# Altium PCB GniMp3.PcbDoc
Units mil, origin at the board's own origin, x right, y up, seen from the top; angles counter-clockwise.
Board outline 6000 x 4000 mil, 2 copper layers (Top Layer, Bottom Layer); 52 components, 37 nets, 213 pads, 24 vias.
Unrouted connection lines stored in the file: 4.
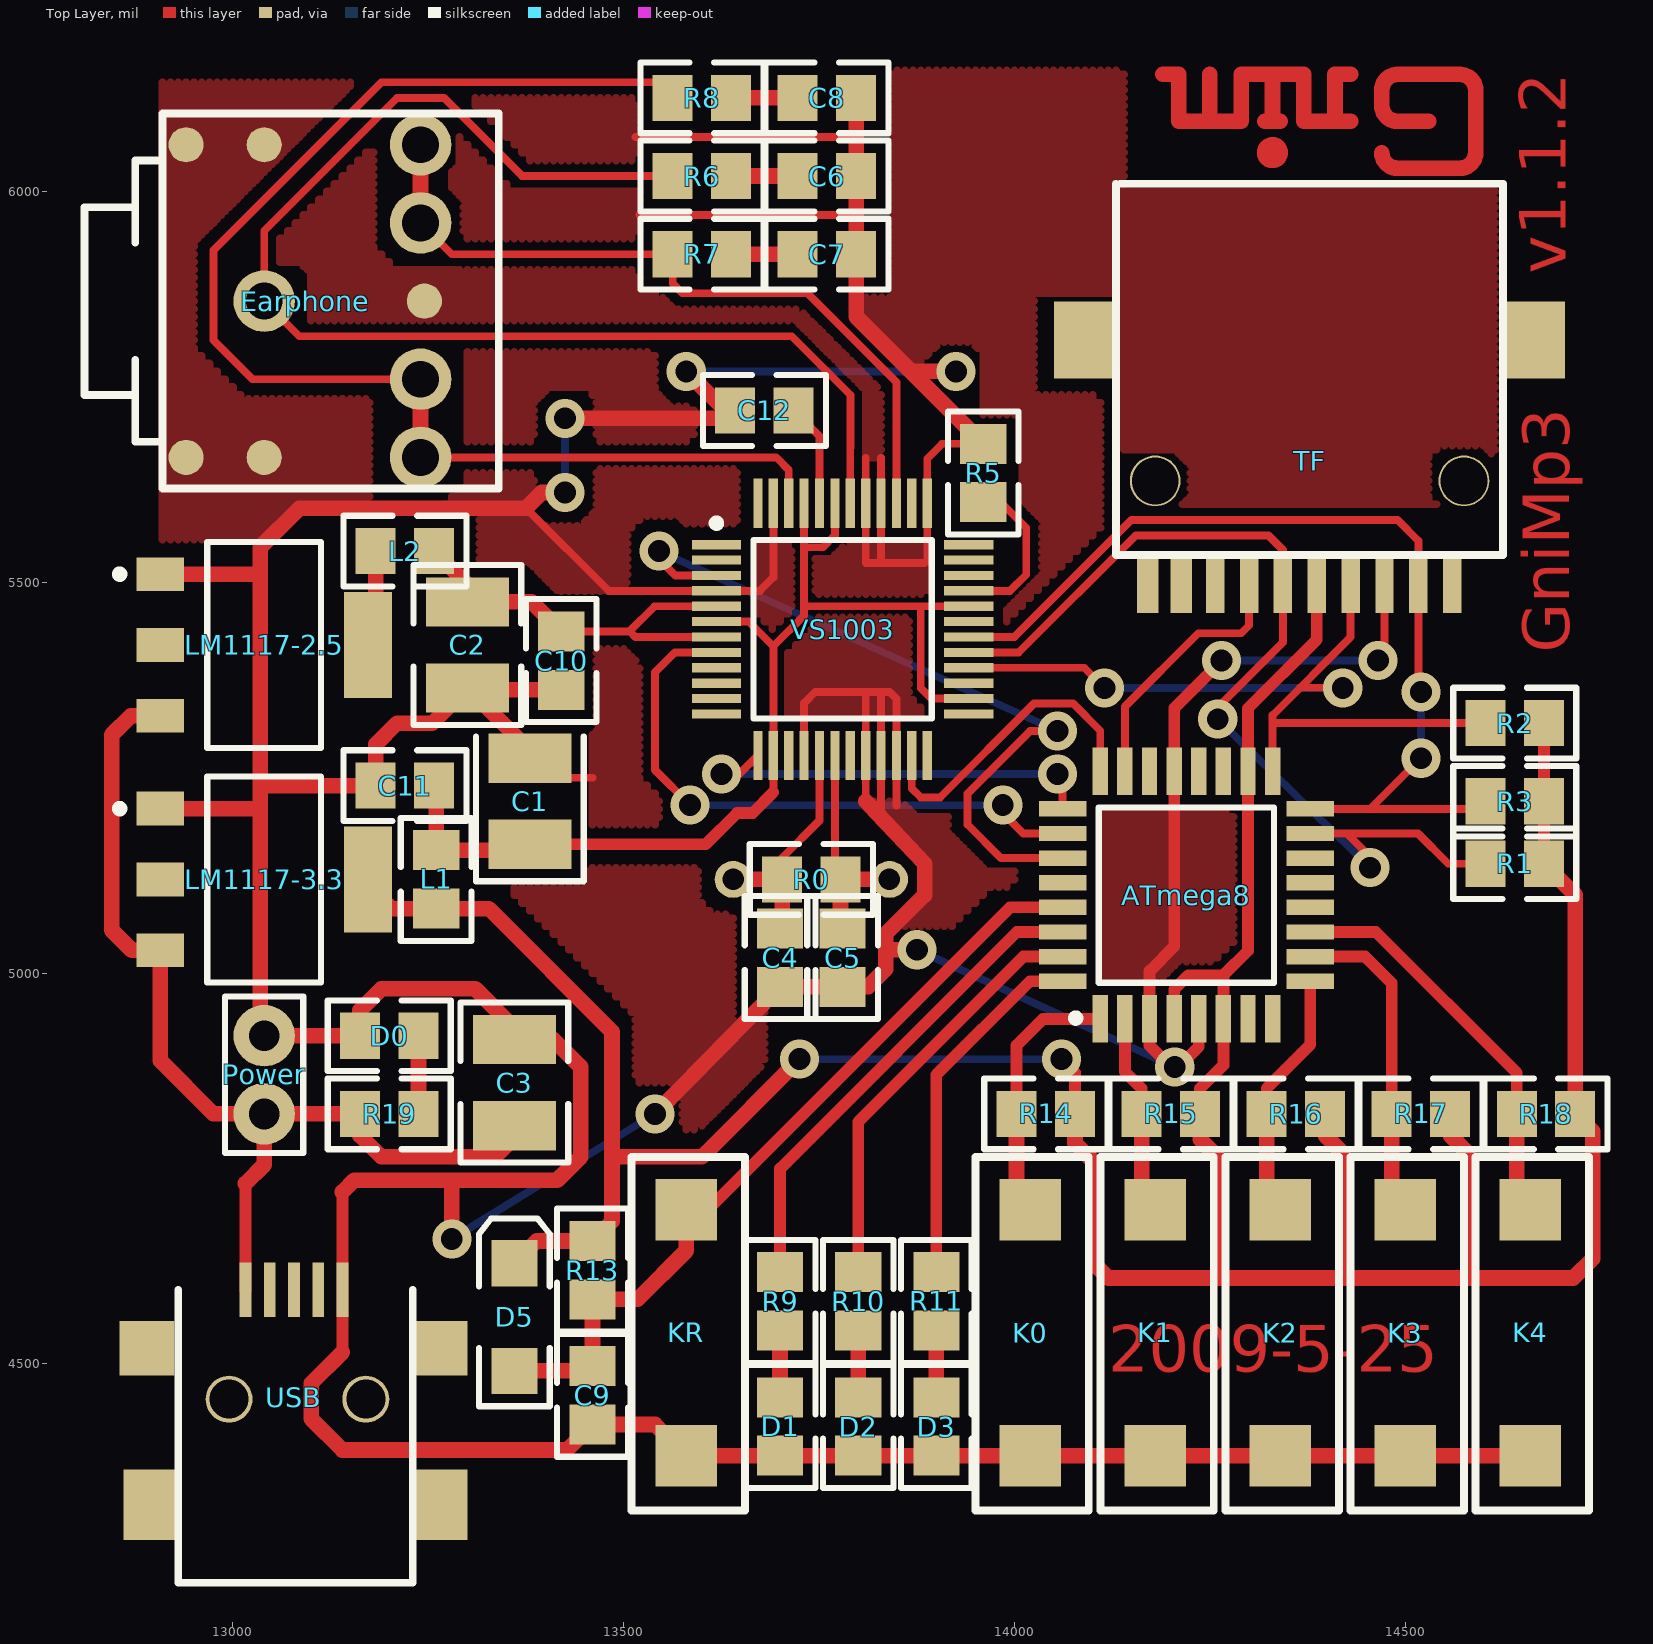
[diagram p0: Top Layer view]
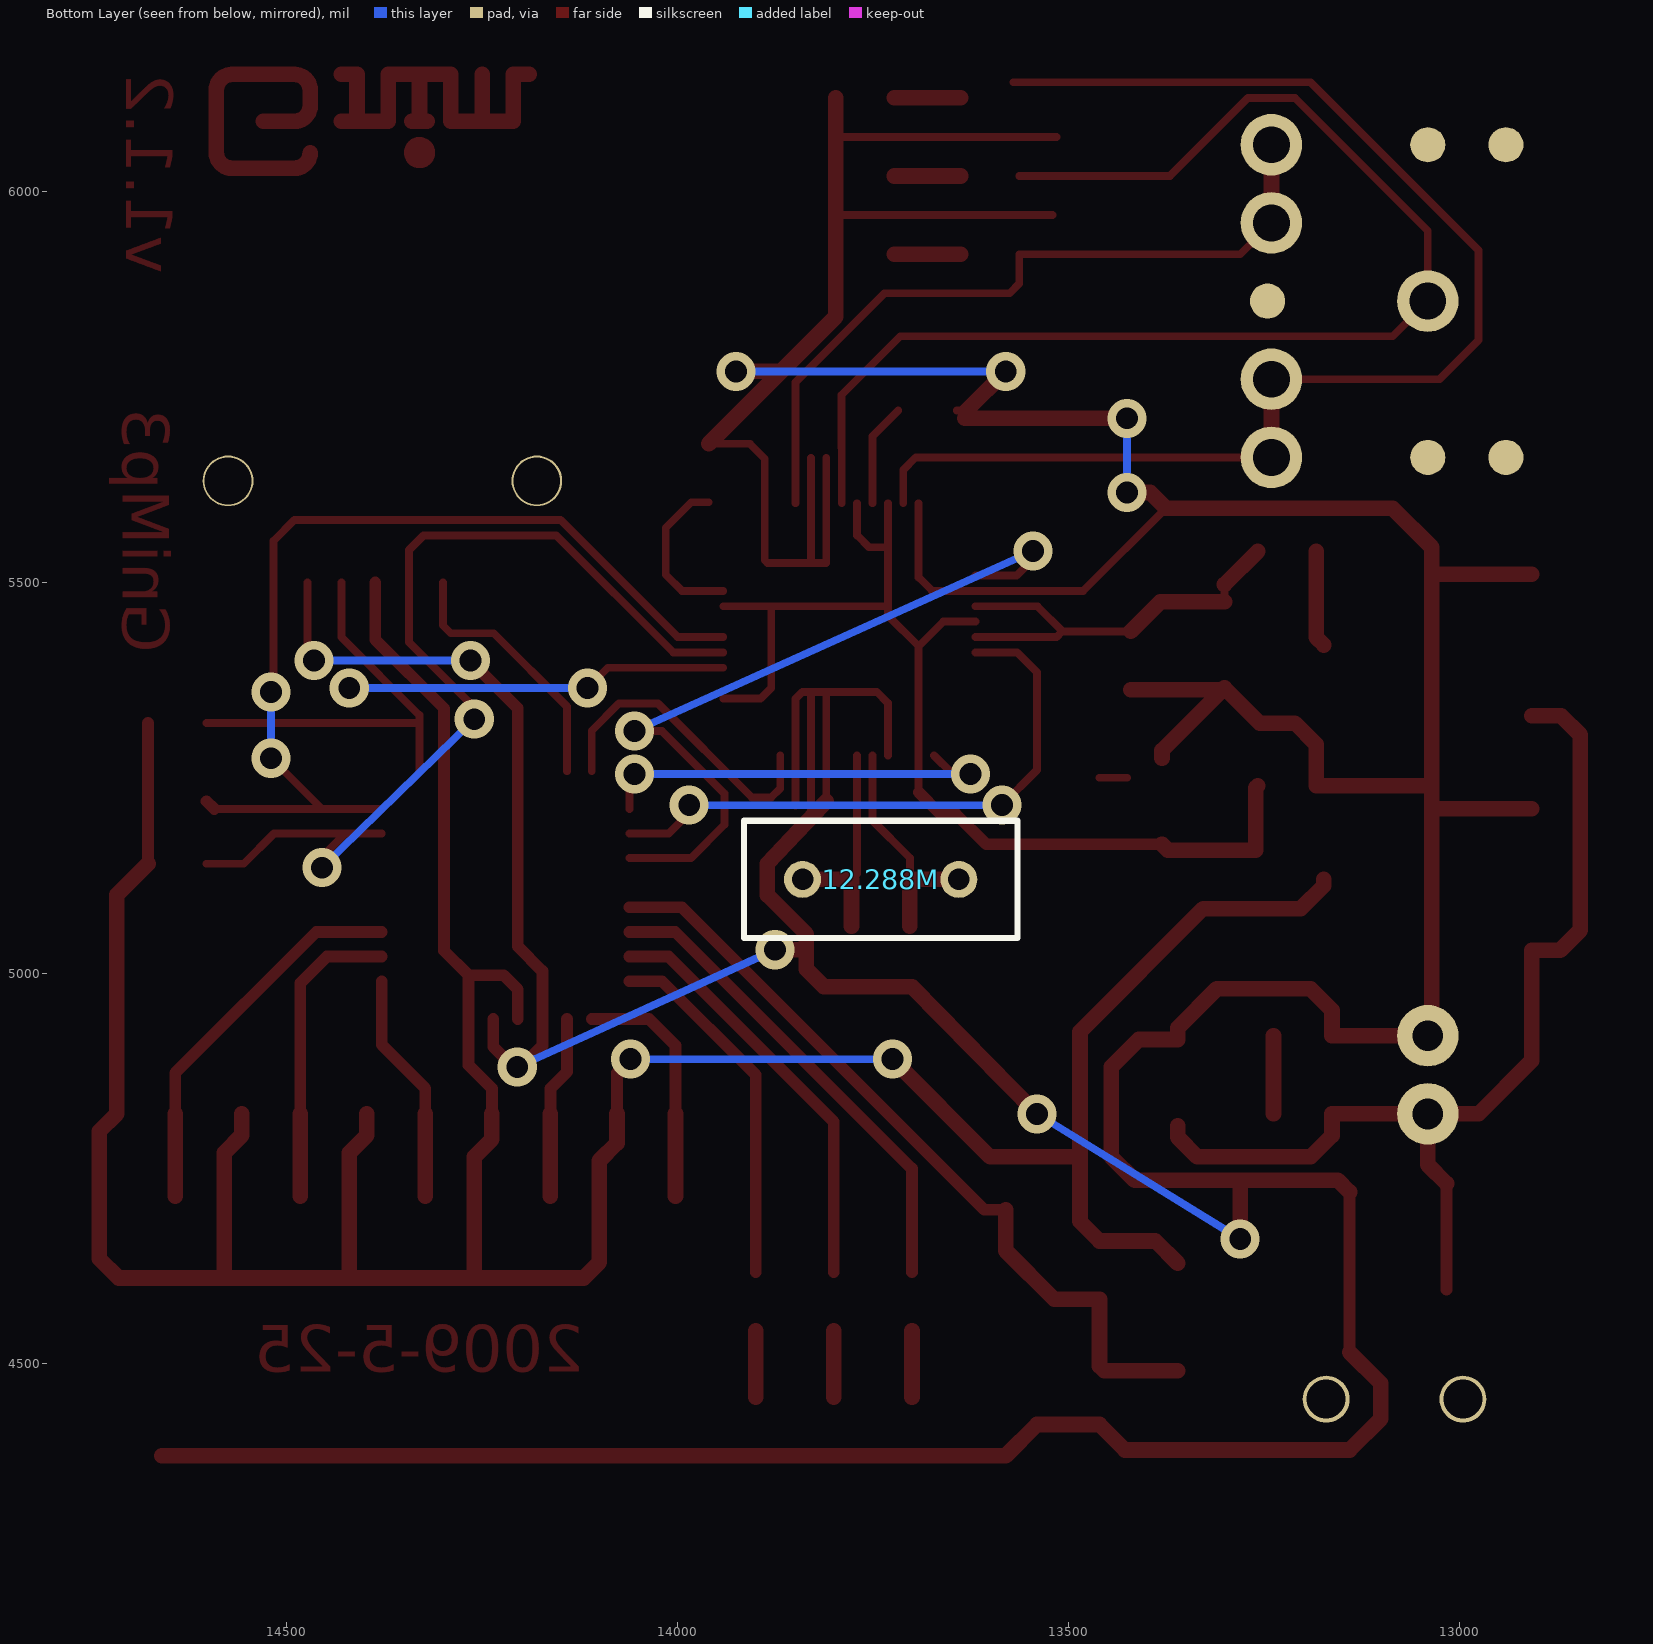
[diagram p1: Bottom Layer view, seen from below]

## Layer stack, top to bottom
Top Layer: signal copper 1.4
Dielectric: dielectric 12.6, FR-4, Dk 4.8
Bottom Layer: signal copper 1.4

## Board outline
1000,1000 7000,1000 7000,5000 1000,5000

## Design rules (kind name [scope] priority, off if disabled: settings)
Clearance [All] p1 off: gap=10
ComponentClearance [All] p1 off: gap=10 collisioncheckmode=0
FanoutControl Fanout_BGA [IsBGA] p1 off: bgadir=Out bgaviamode=Centered fanoutstyle=Auto fanoutdirection=Alternating viagrid=1 // Fanout_BGA (Default Rule)
FanoutControl Fanout_LCC [IsLCC] p2 off: bgadir=Out bgaviamode=Centered fanoutstyle=Auto fanoutdirection=Alternating viagrid=1 // Fanout_LCC (Default Rule)
FanoutControl Fanout_SOIC [IsSOIC] p3 off: bgadir=Out bgaviamode=Centered fanoutstyle=Auto fanoutdirection=Alternating viagrid=1 // Fanout_SOIC (Default Rule)
FanoutControl Fanout_Small [(CompPinCount < 5)] p4 off: bgadir=Out bgaviamode=Centered fanoutstyle=Auto fanoutdirection=OutThenIn viagrid=1 // Fanout_Small (Default Rule)
FanoutControl Fanout_Default [All] p5 off: bgadir=Out bgaviamode=Centered fanoutstyle=Auto fanoutdirection=Alternating viagrid=1 // Fanout_Default (Default Rule)
Height [All] p1 off: minheight=0 maxheight=1000 prefheight=500
HoleSize [All] p1 off: absolutevalues=TRUE maxlimit=100 minlimit=1 maxpercent=80.000 minpercent=20.000
LayerPairs [All] p1 off: enforce=TRUE
PasteMaskExpansion [All] p1 off: expansion=0
PlaneClearance [All] p1 off: clearance=20
PlaneConnect [All] p1 off: planeconnectstyle=Relief reliefexpansion=20 reliefentries=4 reliefconductorwidth=10 reliefairgap=10
PolygonConnect [All] p1 off: connectstyle=Relief reliefconductorwidth=10 reliefentries=4 polygonreliefangle="90 Angle"
RoomDefinition GniMp3 [InComponentClass('GniMp3')] p1 off: confinementstyle=ConfineIn formatcopy=TRUE outline 0,0 2000,0 2000,1000 0,1000
RoutingCorners [All] p1 off: cornerstyle=45-Degree minsetback=100 maxsetback=100
RoutingLayers [All] p1 off: top layer=Horizontal bottom layer=Vertical
RoutingPriority [All] p1 off: routingpriority=0
RoutingTopology [All] p1 off: topology=Shortest
RoutingVias [All] p1 off: holewidth=28 width=50 viastyle="Through Hole" minholewidth=28 minwidth=50 maxholewidth=28 maxwidth=50
ShortCircuit [All] p1 off: allowed=FALSE
SolderMaskExpansion [All] p1 off: expansion=4
TestPointUsage [All] p1 off: valid=0 allowmultiple=FALSE
Testpoint [All] p1 off: side=15 testpointundercomponent=TRUE minsize=40 maxsize=100 preferedsize=60 minholesize=0 maxholesize=40 preferedholesize=32 testpointgrid=1 style=1023 order=1234567890
UnRoutedNet [All] p1 off:
Width [All] p1 off: maxlimit=20 minlimit=10 preferedwidth=10 minimp=50.000000 maximp=50.000000 favimp=50.000000

## Components (designator, comment, footprint, x,y, rotation, side; value= is the part's Value field where it differs from the comment)
12.288M "XTAL" RAD-0.2 13740,5120 r0 bottom
ATmega8 "ATmega8-16AC" 32A 14220,5100 r90 top
C1 "Cap Pol3" CC3225-1210 13380,5220 r90 top
C2 "Cap Pol3" CR3225-1210 13300,5420 r270 top
C3 "Cap Pol3" CR3225-1210 13360,4860 r90 top
C4 "Cap Semi" CR2012-0805 13700,5020 r90 top
C5 "Cap Semi" CR2012-0805 13780,5020 r270 top
C6 "Cap Semi" CR2012-0805 13760,6020 r180 top
C7 "Cap Semi" CR2012-0805 13760,5920 r180 top
C8 "Cap Semi" CR2012-0805 13760,6120 r180 top
C9 "Cap Semi" CR2012-0805 13460,4460 r90 top
C10 "Cap Semi" CR2012-0805 13420,5400 r90 top
C11 "Cap Semi" CR2012-0805 13220,5240 r0 top
C12 "Cap Semi" CR2012-0805 13680,5720 r180 top
D0 "LED2" R2012-0805 13200,4920 r180 top
D1 "LED2" R2012-0805 13700,4420 r270 top
D2 "LED2" R2012-0805 13800,4420 r270 top
D3 "LED2" R2012-0805 13900,4420 r270 top
D5 "Diode 1N4148" DSO-F2/D6.1 13360,4560 r90 top
Earphone "Earphone" Earphone 13040,5860 r90 top
K0 "SW-PB" Key 14020,4540 r270 top
K1 "SW-PB" Key 14180,4540 r270 top
K2 "SW-PB" Key 14340,4540 r270 top
K3 "SW-PB" Key 14500,4540 r270 top
K4 "SW-PB" Key 14660,4540 r270 top
KR "SW-PB" Key 13580,4540 r270 top
L1 "Inductor" R2012-0805 13260,5120 r270 top
L2 "Inductor" R2012-0805 13220,5540 r180 top
LM1117-2.5 "REG1117-5" ZZ311 13040,5420 r270 top
LM1117-3.3 "REG1117-5" ZZ311 13040,5120 r270 top
Power "Header 2" HDR1X2 13040,4920 r270 top
R0 "Res3" R2012-0805 13740,5120 r180 top
R1 "Res3" R2012-0805 14640,5140 r0 top
R2 "Res3" R2012-0805 14640,5320 r0 top
R3 "Res3" R2012-0805 14640,5220 r0 top
R5 "Res3" R2012-0805 13960,5640 r270 top
R6 "Res3" R2012-0805 13600,6020 r180 top
R7 "Res3" R2012-0805 13600,5920 r180 top
R8 "Res3" R2012-0805 13600,6120 r180 top
R9 "Res3" R2012-0805 13700,4580 r90 top
R10 "Res3" R2012-0805 13800,4580 r90 top
R11 "Res3" R2012-0805 13900,4580 r90 top
R13 "Res3" R2012-0805 13460,4620 r90 top
R14 "Res3" R2012-0805 14040,4820 r0 top
R15 "Res3" R2012-0805 14200,4820 r0 top
R16 "Res3" R2012-0805 14360,4820 r0 top
R17 "Res3" R2012-0805 14520,4820 r0 top
R18 "Res3" R2012-0805 14680,4820 r0 top
R19 "Res3" R2012-0805 13200,4820 r180 top
TF "TFcard" "TF Card" 14560,5500 r180 top
USB "USB" mini_USB 13080,4460 r180 top
VS1003 "VS1003B" TQFP-48 13780,5440 r0 top

## Footprints (in the part's own frame and the unit in brackets; to place one, negate y for a bottom-side part, rotate by r counter-clockwise, add the part's x,y. Pads: shape width x height; smd on the part's side, far side on the other; paste and mask are expansions set on the pad)
32A [mm] "QFP; 32 Leads; Body 7 x 7 mm; Pitch 0.8 mm"
  rect 1.55x0.5 smd: 1(-4.025,2.8) 2(-4.025,2) 3(-4.025,1.2) 4(-4.025,0.4) 5(-4.025,-0.4) 6(-4.025,-1.2) 7(-4.025,-2) 8(-4.025,-2.8) 17(4.025,-2.8) 18(4.025,-2) 19(4.025,-1.2) 20(4.025,-0.4) 21(4.025,0.4) 22(4.025,1.2) 23(4.025,2) 24(4.025,2.8)
  rect 0.5x1.55 smd: 9(-2.8,-4.025) 10(-2,-4.025) 11(-1.2,-4.025) 12(-0.4,-4.025) 13(0.4,-4.025) 14(1.2,-4.025) 15(2,-4.025) 16(2.8,-4.025) 25(2.8,4.025) 26(2,4.025) 27(1.2,4.025) 28(0.4,4.025) 29(-0.4,4.025) 30(-1.2,4.025) 31(-2,4.025) 32(-2.8,4.025)
  silkscreen extent -4.12,-2.85 2.85,3.72
CC3225-1210 [mm]
  rect 1.6x2.7 smd: 1(-1.4,0) 2(1.4,0)
  silkscreen extent -2.6,-1.75 2.1,1.75
CR2012-0805 [mm]
  rect 1.3x1.5 smd: 1(-0.95,0) 2(0.95,0)
  silkscreen extent -2,-1.15 2,1.15
CR3225-1210 [mm]
  rect 1.6x2.7 smd: 1(-1.4,0) 2(1.4,0)
  silkscreen extent -2.6,-1.75 2.6,1.75
DSO-F2/D6.1 [mm]
  rect 1.5x1.5 smd: 1(-1.75,0) 2(1.75,0)
  silkscreen extent -2.9,-1.15 3.2,1.15
Earphone [mm] "Earphone"
  round 1.143 all layers, no hole: 0(-5.08,0) 0(-5.08,2.54) 0(0,-5.207) 0(5.08,0) 0(5.08,2.54)
  round 2 hole 1.2: 1(-5.08,-5.08) 2(-2.54,-5.08) 3(2.54,-5.08) 4(5.08,-5.08) 5(0,0)
  silkscreen extent -6.1,-7.62 6.1,5.84
HDR1X2 [mm] "Connector; Header; 2 Position"
  round 2 hole 1: 1(0,0) 2(2.54,0)
  silkscreen extent -1.27,-1.27 3.81,1.27
Key [mm]
  rect 2x2 smd: 1(-4,0) 2(4,0)
  silkscreen extent -5.71,-1.78 5.78,1.91
mini_USB [mil]
  rect 70x90 smd: 0(-185,140) 0(185,140)
  rect 70x70 smd: 0(-185,-60) 0(190,-60)
  round 60 hole 50: 0(-90,5) 0(85,5)
  rect 15x70 smd: 1(64,-135) 2(33,-135) 3(2,-135) 4(-60,-135) NC(-29,-135)
  silkscreen extent -150,-135 150,240
R2012-0805 [mm]
  rect 1.3x1.5 smd: 1(-0.95,0) 2(0.95,0)
  silkscreen extent -2,-1.15 2,1.15
RAD-0.2 [mm]
  round 1.2 hole 0.7: 1(-2.54,0) 2(2.54,0)
  silkscreen extent -4.44,-1.91 4.44,1.91
"TF Card" [mm]
  rect 2x2.5 smd: 0(-2.667,-7.874) 0(11.938,-7.874)
  round 1.651 hole 1.524: 0(-0.381,-3.302) 0(9.652,-3.302)
  rect 0.6x2 smd: 1(6.6,0) 2(5.5,0) 4(4.4,0) 5(3.3,0) 6(2.2,0) 7(1.1,0) 8(0,0) 9(7.7,0)
  rect 0.7x2 smd: 10(8.8,0) 11(9.9,0)
  silkscreen extent -1.65,-12.95 10.92,-0.89
TQFP-48 [mm] "QFP; 48 Leads; Body 7 x 7 mm; Pitch 0.5 mm"
  rect 1.6x0.3 smd: 1(-4.1,2.75) 2(-4.1,2.25) 3(-4.1,1.75) 4(-4.1,1.25) 5(-4.1,0.75) 6(-4.1,0.25) 7(-4.1,-0.25) 8(-4.1,-0.75) 9(-4.1,-1.25) 10(-4.1,-1.75) 11(-4.1,-2.25) 12(-4.1,-2.75) 25(4.1,-2.75) 26(4.1,-2.25) 27(4.1,-1.75) 28(4.1,-1.25) 29(4.1,-0.75) 30(4.1,-0.25) 31(4.1,0.25) 32(4.1,0.75) 33(4.1,1.25) 34(4.1,1.75) 35(4.1,2.25) 36(4.1,2.75)
  rect 0.3x1.6 smd: 13(-2.75,-4.1) 14(-2.25,-4.1) 15(-1.75,-4.1) 16(-1.25,-4.1) 17(-0.75,-4.1) 18(-0.25,-4.1) 19(0.25,-4.1) 20(0.75,-4.1) 21(1.25,-4.1) 22(1.75,-4.1) 23(2.25,-4.1) 24(2.75,-4.1) 37(2.75,4.1) 38(2.25,4.1) 39(1.75,4.1) 40(1.25,4.1) 41(0.75,4.1) 42(0.25,4.1) 43(-0.25,4.1) 44(-0.75,4.1) 45(-1.25,4.1) 46(-1.75,4.1) 47(-2.25,4.1) 48(-2.75,4.1)
  silkscreen extent -4.22,-2.9 2.9,3.57
ZZ311 [mm] "SOT-223/SC-73; 4 Leads; Body 6.7 x 7.3 mm, inc. leads (LxW max)"
  rect 1.1x1.55 smd: 1(-2.3,-3.375) 2(0,-3.375) 3(2.3,-3.375)
  rect 3.45x1.55 smd: 4(0,3.375)
  silkscreen extent -3.35,-4.82 3.35,1.85

## Part data
12.288M: "Crystal Oscillator"
ATmega8: "8-Bit AVR Microcontroller with 8K Bytes of In-System Programmable Flash Memory"
C1 C2 C3: "Polarized Capacitor (Surface Mount)"
C4 C5 C6 C7 C8 C9 C10 C11 C12: "Capacitor (Semiconductor SIM Model)"
D0 D1 D2 D3: "Typical RED, GREEN, YELLOW, AMBER GaAs LED"
D5: "High Conductance Fast Diode"
K0 K1 K2 K3 K4 KR: "Switch"
LM1117-2.5 LM1117-3.3: "800mA and 1A Low Dropout Positive Regulator 2.85V, 3.3V, 5V, and Adjustable"
Power: "Header, 2-Pin"
R0 R1 R2 R3 R5 R6 R7 R8 R9 R10 R11 R13 R14 R15 R16 R17 R18 R19: "Resistor"

## Via types
v1: diameter 50, hole 28, Top Layer to Bottom Layer, 24 vias

## Nets (pads, with @x,y where several pads share a name; then routed paths per layer and width w, separated by ;. In a path a pad name is that pad's centre, name@x,y a point inside that pad or via, vN(x,y) a via of type N, cw(c..) or ccw(c..) an arc to the next point about the centre after c; other vN are vias at no path point)
2.5V: L2.2 LM1117-2.5.4 | length 124
  Top Layer w20: LM1117-2.5.4 13182.6,5429.72 L2.2
3.3V: ATmega8.4 ATmega8.6 ATmega8.18 D5.2 L1.2 LM1117-3.3.4 R1.2 R2.2 R3.2 R13.2 R14.2 R15.2 R16.2 R17.2 R18.2 TF.4 | length 4568.4
  Top Layer w15: v1(14060,4890) 14077.4,4872.6 R14.2 ; ATmega8.4 14204.25,4979.25 14222.24,4997.24 14267.24,4997.24 ; R15.2 14237.4,4852.6 14237.6,4852.6 14267.24,4882.24 14267.24,4997.24 ; TF.4 14386.77,5426.77 14298.74,5338.74 14298.74,5028.74 14267.24,4997.24 ; R1.2 R2.2
  Top Layer w20: LM1117-3.3.4 13172.87,5112.13 13202.4,5082.6 13327.4,5082.6 13485,4925 13485,4682.4 R13.2 13388.5,4657.4 D5.2 ; 13485,4765 13600,4765 v1(13725,4890) ; R14.2 14077.4,4782.6 14100,4760 14100,4630 14120,4610 14715,4610 14740,4635 14740,4797.4 R18.2 14717.4,5100 R1.2 ; R15.2 14237.4,4787.6 14260,4765 14260,4610 ; R16.2 14397.4,4792.6 14420,4770 14420,4610 ; R17.2 14557.4,4792.6 14580,4770 14580,4610
  Bottom Layer w10: v1(13725,4890) v1(14060,4890)
AVDD: C1.1 C11.2 L1.1 VS1003.6 VS1003.14 VS1003.19 VS1003.26 VS1003.32 VS1003.38 VS1003.43 VS1003.45 | length 1486.6
  Top Layer w10: VS1003.6 13659.84,5449.84 13691.42,5418.27 ; 13691.42,5231.42 13691.42,5418.27 ; 13730.79,5545 13755,5545 13770.16,5560.16 VS1003.43 ; VS1003.45 13730.79,5457.64 13691.42,5418.27 ; 13731.26,5469.53 VS1003.32 ; 13880,5469.53 13880,5365 13893.58,5351.42 VS1003.26
  Top Layer w15: C1.1 13604.88,5164.88 13645,5205 13665,5205 13691.42,5231.42
  Top Layer w20: C11.2 13260,5237.4 L1.1 13372.52,5157.4 C1.1
CVDD: C2.1 C10.2 L2.1 VS1003.5 VS1003.7 VS1003.24 VS1003.31 | length 544.2
  Top Layer w10: C2.1 C2.1@13300,5497.4 ; C10.2 13507.6,5437.4 13514.84,5430.16 VS1003.7 ; 13507.4,5437.4 13539.53,5469.53 VS1003.5
  Top Layer w20: L2.1 C2.1@13300,5497.4 ; C2.1 13382.28,5475.12 C10.2
GND: ATmega8.3 ATmega8.5 ATmega8.21 C1.2 C2.2 C3.2 C4.1 C5.2 C6.1 C7.1 C8.1 C9.1 C10.1 C11.1 C12.2 D0.2 D1.2 D2.2 D3.2 K0.2 K1.2 K2.2 K3.2 K4.2 KR.2 LM1117-2.5.1 LM1117-3.3.1 Power.1 R5.1 TF.6 USB.4 VS1003.4 VS1003.16 VS1003.20 VS1003.21 VS1003.22 VS1003.37 VS1003.40 VS1003.41 VS1003.47 | length 10641.2
  Top Layer w10: 13375,5595 13480.79,5489.21 13674.21,5489.21 13691.42,5506.42 VS1003.47 ; C1.2@13425,5250 13460,5250 ; 13515,6070 13797.4,6070 ; 13520,5970 13797.4,5970 ; C12.2@13630,5720 C12.2 ; VS1003.16 13730.79,5345.79 13745,5360 13840,5360 13848.9,5351.1 13848.9,5214.63 ; 13809.53,5220 13809.53,5359.53 ; 13809.53,5659.53 13809.53,5525.47 13810,5525 13885,5525 13888.27,5528.27 13888.27,5658.27 13907.4,5677.4 R5.1 ; 13829.21,5210.79 13829.21,5359.21 ; 13829.21,5525.79 13829.21,5659.21 ; v1@14200,4880 v1@14210,4880 ; v1(14465,5400) 14473.39,5408.39 TF.6
  Top Layer w15: 13140,4515 USB.4 13140,4720 ; v1@14200,4880 14172.76,4907.24 ATmega8.3 14172.76,5002.76 14204.25,5034.25 ATmega8.21 14204.25,5339.25 v1(14265,5400) ; v1@14210,4880 14235.75,4905.75 ATmega8.5
  Top Layer w20: LM1117-3.3.1 13034.45,5210.55 ; LM1117-2.5.1 13034.45,5510.55 ; Power.1@13035,4925 13035,5545 13085,5595 13375,5595 13395,5615 v1(13425,5615) ; 13035,5240 C11.1 13182.6,5292.6 13210,5320 13255.12,5320 C2.2 13380,5284.88 C1.2 ; Power.1 D0.2 13162.6,4952.6 13190,4980 13310,4980 13360,4930 C3.2 13409.88,4915.12 13445,4880 13445,4765 13415,4735 13155,4735 13140,4720 ; 13140,4515 13100,4475 13100,4430 13140,4390 13427.4,4390 C9.1 13539.92,4422.6 KR.2 K4.2 ; v1(13280,4660) 13280,4735 ; C2.2@13302.28,5362.6 C10.1 ; v1(13425,5710) C12.2@13632.6,5710 ; v1(13540,4820) C4.1 C5.2 13812.6,4982.6 13835,5005 13835,5050 13885,5100 13885,5140 13823.4,5205.3 13809.53,5220 ; v1(13580,5770) C12.2@13630,5720 ; C8.1 C7.1 13797.4,5840 R5.1 ; 13835,5030 v1(13875,5030) ; 13867.4,5770 v1(13925,5770)
  Bottom Layer w10: v1(13280,4660) v1(13540,4820) ; v1(13425,5615) v1(13425,5710) ; v1(13580,5770) v1(13925,5770) ; v1(13875,5030) v1(14205,4880) ; v1(14265,5400) v1(14465,5400)
Net12.288M_1: 12.288M.1 C4.2 R0.2 VS1003.17 | length 301
  Top Layer w10: R0.2 13702.6,5147.6 13750.47,5195.47 VS1003.17
  Top Layer w20: 12.288M.1 R0.2 C4.2@13702.6,5060
Net12.288M_2: 12.288M.2 C5.1 R0.1 VS1003.18 | length 273.9
  Top Layer w10: R0.1@13770.16,5127.24 VS1003.18
  Top Layer w20: C5.1@13777.4,5060 R0.1 12.288M.2
NetATmega8_1: ATmega8.1 K0.1 R14.1 | length 313.9
  Top Layer w15: R14.1 14002.6,4907.6 14036.54,4941.54 ATmega8.1
  Top Layer w20: K0.1@14002.6,4714.88 R14.1
NetATmega8_2: ATmega8.2 K1.1 R15.1 | length 235.5
  Top Layer w15: ATmega8.2 14141.26,4873.74 14162.6,4852.4 R15.1
  Top Layer w20: K1.1@14162.6,4714.88 R15.1
NetATmega8_9: ATmega8.9 K2.1 R16.1 | length 298
  Top Layer w15: R16.1 14322.6,4852.6 14378.46,4908.46 ATmega8.9
  Top Layer w20: K2.1@14322.6,4714.88 R16.1
NetATmega8_10: ATmega8.10 K3.1 R17.1 | length 390.7
  Top Layer w15: ATmega8.10 14448.74,5021.26 14482.6,4987.4 R17.1
  Top Layer w20: K3.1@14482.6,4714.88 R17.1
NetATmega8_11: ATmega8.11 K4.1 R18.1 | length 496.4
  Top Layer w15: ATmega8.11 14462.24,5052.76 14642.6,4872.4 R18.1
  Top Layer w20: K4.1@14642.6,4714.88 R18.1
NetATmega8_15: ATmega8.15 R1.1 TF.2 VS1003.29 | length 1291.3
  Top Layer w10: VS1003.29 14005.47,5410.47 14155,5560 14325,5560 14343.47,5541.53 14343.47,5423.47 14260,5340 v1(14260,5325) ; ATmega8.15 14516.26,5178.74 14555,5140 R1.1 ; 14425,5178.74 14455,5148.74 v1(14455,5135)
  Bottom Layer w10: v1(14260,5325) v1(14455,5135)
NetATmega8_16: ATmega8.16 R3.1 TF.7 VS1003.30 | length 1258.1
  Top Layer w10: VS1003.30 13999.84,5430.16 14149.68,5580 14490,5580 14516.69,5553.31 14516.69,5363.31 v1(14520,5360) ; ATmega8.16 R3.1@14592.83,5210.24 ; 14455,5210.24 v1@14519.76,5275 ; v1@14509.76,5275 v1(14520,5275)
  Top Layer w15: R3.1@14592.83,5210.24 R3.1
  Bottom Layer w10: v1(14520,5275) v1(14520,5360)
NetATmega8_17: ATmega8.17 R2.1 TF.5 VS1003.28 | length 1099
  Top Layer w10: VS1003.28 14089.21,5390.79 v1(14115,5365) ; ATmega8.17 14330.24,5330.24 14430.08,5430.08 TF.5 ; 14330.24,5320 R2.1 ; 14365.27,5365.27 v1@14419.73,5365.27
  Bottom Layer w10: v1(14115,5365) v1(14420,5365)
NetATmega8_23: ATmega8.23 TF.1 | length 339.6
  Top Layer w10: ATmega8.23 14141.26,5341.26 14235,5435 14290,5435 14300.16,5445.16 TF.1
NetATmega8_24: ATmega8.24 VS1003.23 | length 404
  Top Layer w10: VS1003.23 13868.58,5236.42 13880,5225 13905,5225 14025,5345 14075,5345 14109.76,5310.24 ATmega8.24
NetATmega8_25: ATmega8.25 VS1003.13 | length 534
  Top Layer w10: v1(13625,5255) 13648.15,5255 VS1003.13 ; v1(14055,5255) 14061.54,5248.46 ATmega8.25
  Bottom Layer w10: v1(13625,5255) v1(14055,5255)
NetATmega8_26: ATmega8.26 VS1003.8 | length 775.2
  Top Layer w10: v1(13585,5215) 13540,5260 13540,5385 13565.47,5410.47 VS1003.8 ; v1(13985,5215) 13985,5205 14011.26,5178.74 ATmega8.26
  Bottom Layer w10: v1(13585,5215) v1(13985,5215)
NetATmega8_27: ATmega8.27 VS1003.3 | length 979.2
  Top Layer w10: v1(13545,5540) 13545,5530 13566.1,5508.9 VS1003.3 ; v1(14055,5310) 14020,5310 13940,5230 13940,5190 13982.76,5147.24 ATmega8.27
  Bottom Layer w10: v1(13545,5540) v1(14055,5310)
NetATmega8_29: ATmega8.29 C9.2 D5.1 KR.1 R13.1 | length 1027.9
  Top Layer w15: KR.1 13607.48,4697.48 13994.25,5084.25 ATmega8.29
  Top Layer w20: D5.1 13453.7,4491.1 C9.2 R13.1 13517.6,4582.6 13580,4645 KR.1
NetATmega8_30: ATmega8.30 R9.2 | length 619.5
  Top Layer w15: R9.2 13700,4750 14002.76,5052.76 ATmega8.30
NetATmega8_31: ATmega8.31 R10.2 | length 541.6
  Top Layer w15: R10.2 13800,4810 14011.26,5021.26 ATmega8.31
NetATmega8_32: ATmega8.32 R11.2 | length 463.7
  Top Layer w15: R11.2 13900,4870 14019.76,4989.76 ATmega8.32
NetC6_2: C6.2 R6.1 | length 85.2
  Top Layer w20: R6.1 C6.2
NetC7_2: C7.2 R7.1 | length 85.2
  Top Layer w20: R7.1 C7.2
NetC8_2: C8.2 R8.1 | length 85.2
  Top Layer w20: R8.1 C8.2
NetC12_1: C12.1 VS1003.44 | length 132.3
  Top Layer w10: C12.1 13750.47,5686.93 VS1003.44
NetD0_1: D0.1 R19.1 | length 100
  Top Layer w20: R19.1 D0.1
NetD1_1: D1.1 R9.1 | length 85.2
  Top Layer w20: D1.1 R9.1
NetD2_1: D2.1 R10.1 | length 85.2
  Top Layer w20: D2.1 R10.1
NetD3_1: D3.1 R11.1 | length 85.2
  Top Layer w20: D3.1 R11.1
NetEarphone_1: Earphone.1 Earphone.2 R8.2 VS1003.46 | length 1705
  Top Layer w10: Earphone.1 13695,5660 13711.1,5643.9 VS1003.46 ; Earphone.2 13025,5760 12975,5810 12975,5925 13190,6140 R8.2@13570,6140
  Top Layer w20: Earphone.1 Earphone.2
NetEarphone_3: Earphone.3 Earphone.4 R7.2 VS1003.39 | length 970.1
  Top Layer w10: Earphone.3 13280,5920 R7.2 13562.6,5882.4 13575,5870 13735,5870 13848.9,5756.1 VS1003.39
  Top Layer w20: Earphone.3 Earphone.4
NetEarphone_5: Earphone.5 R6.2 VS1003.42 | length 1662.7
  Top Layer w10: R6.2 13370,6020 13270,6120 13210,6120 13040,5950 Earphone.5 13085,5815 13715,5815 13790,5740 VS1003.42
NetR5_2: R5.2 VS1003.33 | length 210.7
  Top Layer w10: VS1003.33 13994.21,5489.21 14015,5510 14015,5570 13982.4,5602.6 R5.2
VCC: C3.1 LM1117-2.5.3 LM1117-3.3.3 Power.2 R19.2 USB.1 | length 1316.7
  Top Layer w15: USB.1 13016,4731
  Top Layer w20: LM1117-2.5.3 12869.45,5329.45 12845,5305 12845,5055 12870.55,5029.45 LM1117-3.3.3 12907.13,4887.87 12975,4820 R19.2 13162.6,4792.4 13190,4765 13335,4765 13360,4790 C3.1 ; 13016,4731 13040,4755 Power.2
pads on no net: ATmega8.7 ATmega8.8 ATmega8.12 ATmega8.13 ATmega8.14 ATmega8.19 ATmega8.20 ATmega8.22 ATmega8.28 Earphone.0 LM1117-2.5.2 LM1117-3.3.2 TF.0 TF.8 TF.9 TF.10 TF.11 USB.0 USB.2 USB.3 USB.NC VS1003.1 VS1003.2 VS1003.9 VS1003.10 VS1003.11 VS1003.12 VS1003.15 VS1003.25 VS1003.27 VS1003.34 VS1003.35 VS1003.36 VS1003.48
copper on no net: | length 1159.9
  Top Layer w20: 14190,6150 14210,6150 14210,6130 14210,6110 14210,6090 14230,6090 14250,6090 ; 14250,6150 14250,6130 14250,6110 14250,6090 ; 14320,6090 14340,6090 ; 14330,6090 14330,6110 14330,6130 14330,6150 ; 14430,6090 14410,6090 ; 14430,6150 14410,6150 14410,6130 14410,6110 14410,6090 ; 14470,6050 ccw(c14490,6050) 14490,6030 14510,6030 14530,6030 14550,6030 14570,6030 ccw(c14570,6050) 14590,6050 14590,6070 14590,6090 14590,6110 14590,6130 ccw(c14570,6130) 14570,6150 14550,6150 14530,6150 14510,6150 14490,6150 ccw(c14490,6130) 14470,6130 14470,6110 ccw(c14490,6110) 14490,6090 14510,6090 14530,6090 ; 14250,6090 14270,6090 14290,6090 14290,6110 14290,6130 14290,6150 14310,6150 14330,6150 ; 14330,6150 14350,6150 14370,6150 14370,6130 14370,6110 14370,6090 14390,6090 14410,6090 ; 14340,6050 ccw(c14330,6050) 14340,6050

## Polygon pours and split planes (outlines as drawn)
GND on Top Layer (hatched 90Degree grid 0 track 10): 13809.53,5659.53 13829.21,5659.53 13829.21,5745 13725,5849.21 13565,5849.21 13545,5869.21 13520,5869.21 13520,5900 13285,5900 13285,5835 13720,5835 13809.53,5745.47
GND on Top Layer (hatched 90Degree grid 0 track 10): 13845,5865 13845,6155 14140,6155 14140,6000 14615,6000 14615,5660 14600,5675 14545,5675 14530,5660 14530,5610 14545,5595 14540,5600 14215,5600 14225,5610 14225,5650 14205,5670 14140,5670 14140,5870 13845,5870
GND on Top Layer (hatched 90Degree grid 0 track 10): 13265,5595 13295,5625 13300,5630 13300,5640 13385,5640 13385,5604.93 13375.07,5595
GND on Top Layer (hatched 90Degree grid 0 track 10): 13290,6070 13355,6005 13360,6000 13520,6000 13520,5940 13295,5940 13295,5990 13280,6005 13280,6025 13290,6035
GND on Top Layer (hatched 90Degree grid 0 track 10): 13305,6120 13515,6120 13515,6040 13380,6040 13300,6120
GND on Top Layer (hatched 90Degree grid 0 track 10): 13180,6060 13180,5930 13210,5900 13285,5900 13285,5835 13100,5835 13100,5895 13090,5905 13085,5910 13060,5910 13060,5940 13175,6055
GND on Top Layer (hatched 90Degree grid 0 track 10): 13175,5595 13175,5735 13015,5735 12950,5800 12950,5935 13155,6140 12910,6140 12910,5555 13040,5555 13080,5595
GND on Top Layer (hatched 90Degree grid 0 track 10): 13990,5470 13990,5450 14110,5570 14110,5740 14025,5740 14025,5865 13797.4,5865 13797.4,5840 13867.4,5770 13905,5807.6 13945,5807.6 13960,5792.6 13960,5715 14010,5715 14010,5605 14035,5580 14035,5510 13990,5465
GND on Top Layer (hatched 90Degree grid 0 track 10): 13465,5645 13645,5645 13645,5575 13580,5575 13570,5585 13525,5585 13505,5565 13505,5489.21 13415,5489.21 13380,5524.21 13315,5524.21 13315,5585 13384.75,5585 13397.24,5572.51 13445,5572.51 13465,5592.51
GND on Top Layer (hatched 90Degree grid 0 track 10): 13300,5790 13300,5680 13385,5680 13385,5730 13405,5750 13450,5750 13465,5735 13465,5680 13590,5680 13590,5725 13560,5725 13540,5745 13540,5795 13300,5795
GND on Top Layer (hatched 90Degree grid 0 track 10): 14110,4990 14185,4990 14210,5015 14255,5015 14280,5040 14280,5210 14110,5210
GND on Top Layer (hatched 90Degree grid 0 track 10): 13465,5415 13500,5415 13520,5395 13520,5250 13545,5225 13545,5190 13460,5190 13460,5305 13465,5310
GND on Top Layer (hatched 90Degree grid 0 track 10): 13809.53,5220 13855,5220 13875,5200 13915,5200 13915,5180 13965,5130 14000,5130 14000,5110 13970,5110 13920,5060 13845,5060 13885,5100 13885,5140 13809.53,5215.47
GND on Top Layer (hatched 90Degree grid 0 track 10): 13575,4860 13575,4800 13595,4800 13680,4885 13680,4965
GND on Top Layer (hatched 90Degree grid 0 track 10): 13350,5110 13455,5110 13455,5135 13595,5135 13595,5095 13615,5075 13640,5075 13640,4925 13575,4860 13515,4860 13515,4945
GND on Top Layer (hatched 90Degree grid 0 track 10): 13745,5530 13745,5485 13890,5485 13890,5550 13785,5550 13765,5530
GND on Top Layer (hatched 90Degree grid 0 track 10): 13670,5550 13715,5550 13715,5465 13690,5440 13670,5460
no net on Top Layer (hatched 90Degree grid 0 track 10): 13750,5455 13865,5455 13865,5355 13890,5330 13710,5330 13710,5410 13750,5450

## Other copper
Top Layer:
  text "v1.1.2" at 14705,5895 h60 r90
  text "GniMp3" at 14710,5410 h60 r90
  text "2009-5-25" at 14120,4490 h60